# EAGLE board MegaMiniProto (EAGLE 6.3)
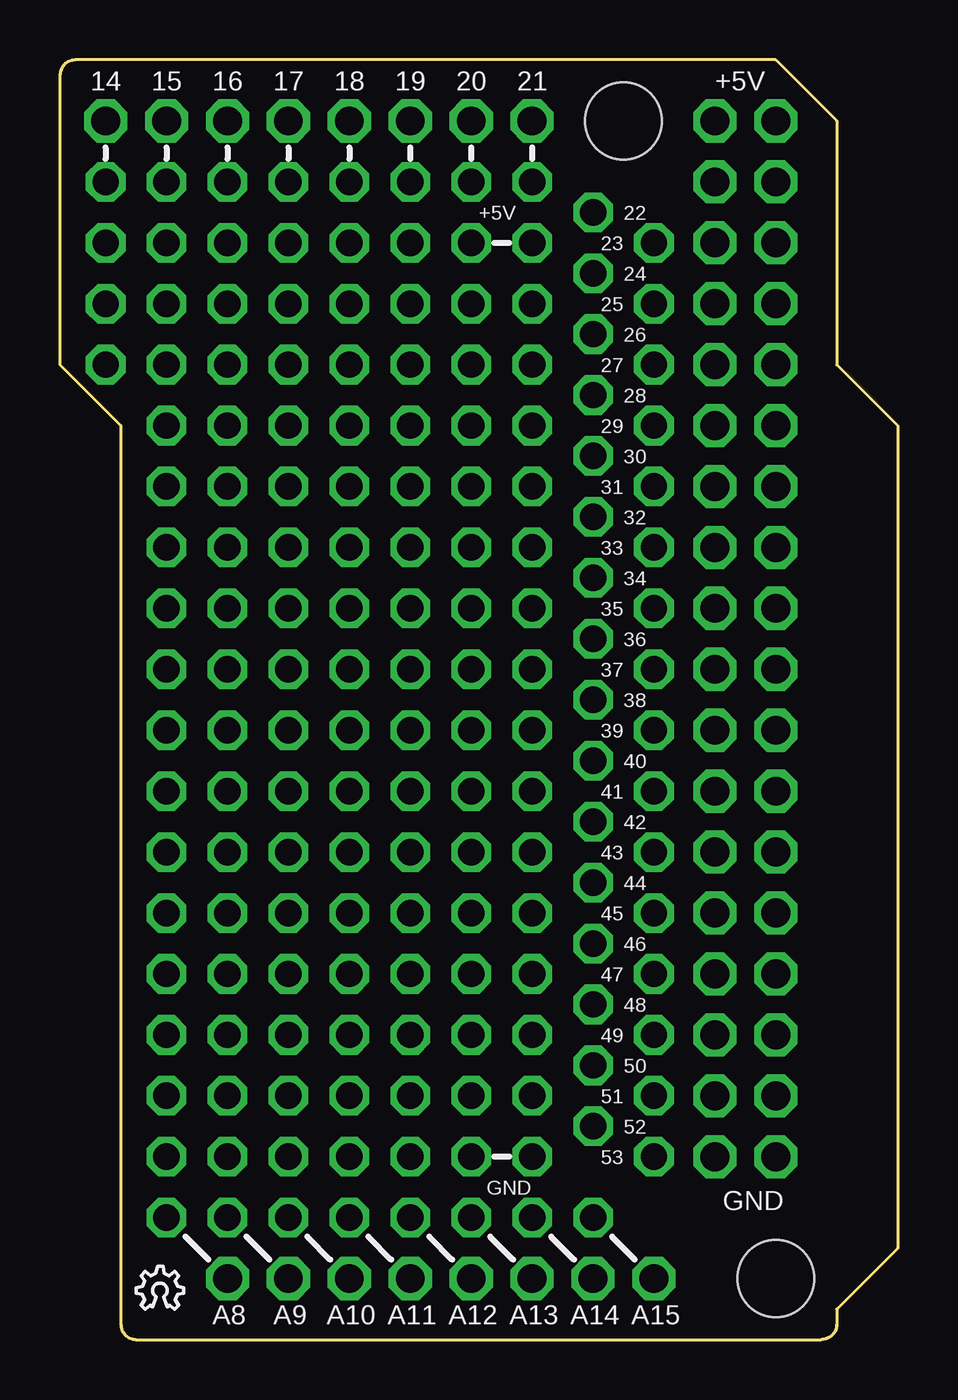
[diagram p0: board, top side]
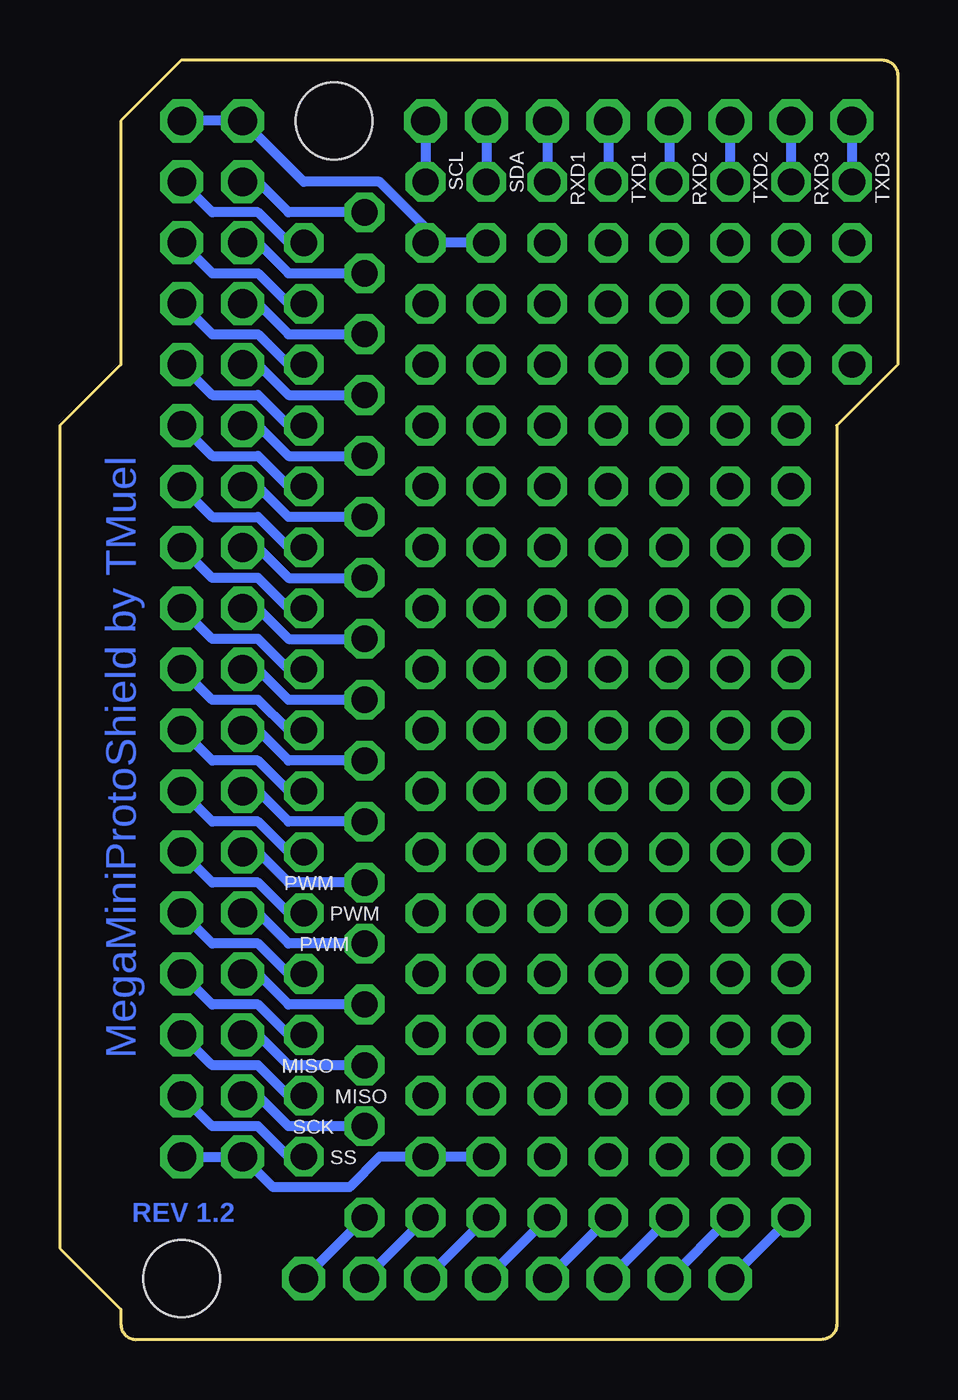
[diagram p1: board, bottom side, seen from below]

Size 34.93 x 53.34 mm. Coordinates in mm from the lower left corner, seen from the top.
Copper layers (1*16): Top 0.0356mm / dielectric 1.5011mm / Bottom 0.0356mm
Design rules "LaenPCBOrder": minimum track width 6mil, minimum drill 13mil, track to track 6mil, track to pad 6mil, pad to pad 6mil, via to via 6mil, smd to smd 6mil, copper to edge 15mil, drill to drill 6mil, minimum pad ring 7mil, minimum via ring 7mil, stop-mask expansion 3mil, vias tented up to drill 0mil, thermal gap 10mil

## Footprints (pad centres in the part's own frame; a part is rotated, then mirrored left to right if it is on the bottom)
MINI_MEGASHIELD_NO_LABEL = drill 1.2 octagon: 5V1 27.94,50.8; 5V2 30.48,50.8; 14 2.54,50.8; 15 5.08,50.8; 16 7.62,50.8; 17 10.16,50.8; 18 12.7,50.8; 19 15.24,50.8; 20 17.78,50.8; 21 20.32,50.8; 22 27.94,48.26; 23 30.48,48.26; 24 27.94,45.72; 25 30.48,45.72; 26 27.94,43.18; 27 30.48,43.18; 28 27.94,40.64; 29 30.48,40.64; 30 27.94,38.1; 31 30.48,38.1; 32 27.94,35.56; 33 30.48,35.56; 34 27.94,33.02; 35 30.48,33.02; 36 27.94,30.48; 37 30.48,30.48; 38 27.94,27.94; 39 30.48,27.94; 40 27.94,25.4; 41 30.48,25.4; 42 27.94,22.86; 43 30.48,22.86; 44 27.94,20.32; 45 30.48,20.32; 46 27.94,17.78; 47 30.48,17.78; 48 27.94,15.24; 49 30.48,15.24; 50 27.94,12.7; 51 30.48,12.7; 52 27.94,10.16; 53 30.48,10.16; A8 7.62,2.54; A9 10.16,2.54; A10 12.7,2.54; A11 15.24,2.54; A12 17.78,2.54; A13 20.32,2.54; A14 22.86,2.54; A15 25.4,2.54; GND1 27.94,7.62; GND2 30.48,7.62 | hole 3.2: 30.48,2.54; 24.13,50.8

## Placement (x,y rotation side)
E$1  [OSHW_6X70_NOTEXT]  3.17,1.27 0 top
E$2  [MINI_MEGASHIELD_NO_LABEL]  -0.64,0 0 top

## Library data of the parts
E$1 = ohw-logo
E$2 = arduino

## Nets
14: E$2.14
15: E$2.15
16: E$2.16
17: E$2.17
18: E$2.18
19: E$2.19
20: E$2.20
21: E$2.21
22: E$2.22
23: E$2.23
24: E$2.24
25: E$2.25
26: E$2.26
27: E$2.27
28: E$2.28
29: E$2.29
30: E$2.30
31: E$2.31
32: E$2.32
33: E$2.33
34: E$2.34
35: E$2.35
36: E$2.36
37: E$2.37
38: E$2.38
39: E$2.39
40: E$2.40
41: E$2.41
42: E$2.42
43: E$2.43
44: E$2.44
45: E$2.45
46: E$2.46
47: E$2.47
48: E$2.48
49: E$2.49
50: E$2.50
51: E$2.51
52: E$2.52
53: E$2.53
+5V: E$2.5V1 E$2.5V2
A8: E$2.A8
A9: E$2.A9
A10: E$2.A10
A11: E$2.A11
A12: E$2.A12
A13: E$2.A13
A14: E$2.A14 E$2.A15
GND: E$2.GND1 E$2.GND2

## Tracks (layer width: path | path; a pad name or v marks a point on that pad's centre or on a via)
14  (via drill 1.1 pad 1.27)
  Bottom 0.406: E$2.14 v1.91,48.26
15  (via drill 1.1 pad 1.27)
  Bottom 0.406: E$2.15 v4.45,48.26
16  (via drill 1.1 pad 1.27)
  Bottom 0.406: E$2.16 v6.99,48.26
17  (via drill 1.1 pad 1.27)
  Bottom 0.406: E$2.17 v9.53,48.26
18  (via drill 1.1 pad 1.27)
  Bottom 0.406: E$2.18 v12.06,48.26
19  (via drill 1.1 pad 1.27)
  Bottom 0.406: E$2.19 v14.61,48.26
20  (via drill 1.1 pad 1.27)
  Bottom 0.406: E$2.20 v17.14,48.26
21  (via drill 1.1 pad 1.27)
  Bottom 0.406: E$2.21 v19.68,48.26
22  (via drill 1.1 pad 1.27)
  Bottom 0.406: v22.22,46.99 25.4,46.99 26.67,48.26 E$2.22
23  (via drill 1.1 pad 1.27)
  Bottom 0.406: v24.76,45.72 25.4,45.72 26.67,46.99 28.57,46.99 E$2.23
24  (via drill 1.1 pad 1.27)
  Bottom 0.406: E$2.24 26.67,45.72 25.4,44.45 v22.22,44.45
25  (via drill 1.1 pad 1.27)
  Bottom 0.406: E$2.25 28.57,44.45 26.67,44.45 25.4,43.18 v24.76,43.18
26  (via drill 1.1 pad 1.27)
  Bottom 0.406: E$2.26 26.67,43.18 25.4,41.91 v22.22,41.91
27  (via drill 1.1 pad 1.27)
  Bottom 0.406: E$2.27 28.57,41.91 26.67,41.91 25.4,40.64 v24.76,40.64
28  (via drill 1.1 pad 1.27)
  Bottom 0.406: E$2.28 26.67,40.64 25.4,39.37 v22.22,39.37
29  (via drill 1.1 pad 1.27)
  Bottom 0.406: E$2.29 28.57,39.37 26.67,39.37 25.4,38.1 v24.76,38.1
30  (via drill 1.1 pad 1.27)
  Bottom 0.406: E$2.30 26.67,38.1 25.4,36.83 v22.22,36.83
31  (via drill 1.1 pad 1.27)
  Bottom 0.406: E$2.31 28.57,36.83 26.67,36.83 25.4,35.56 v24.76,35.56
32  (via drill 1.1 pad 1.27)
  Bottom 0.406: E$2.32 26.67,35.56 25.4,34.29 v22.22,34.29
33  (via drill 1.1 pad 1.27)
  Bottom 0.406: E$2.33 28.57,34.29 26.67,34.29 25.4,33.02 v24.76,33.02
34  (via drill 1.1 pad 1.27)
  Bottom 0.406: E$2.34 26.67,33.02 25.4,31.75 v22.22,31.75
35  (via drill 1.1 pad 1.27)
  Bottom 0.406: v24.76,30.48 25.4,30.48 26.67,31.75 28.57,31.75 E$2.35
36  (via drill 1.1 pad 1.27)
  Bottom 0.406: E$2.36 26.67,30.48 25.4,29.21 v22.22,29.21
37  (via drill 1.1 pad 1.27)
  Bottom 0.406: v24.76,27.94 25.4,27.94 26.67,29.21 28.57,29.21 E$2.37
38  (via drill 1.1 pad 1.27)
  Bottom 0.406: v22.22,26.67 25.4,26.67 26.67,27.94 E$2.38
39  (via drill 1.1 pad 1.27)
  Bottom 0.406: v24.76,25.4 25.4,25.4 26.67,26.67 28.57,26.67 E$2.39
40  (via drill 1.1 pad 1.27)
  Bottom 0.406: v22.22,24.13 25.4,24.13 26.67,25.4 E$2.40
41  (via drill 1.1 pad 1.27)
  Bottom 0.406: v24.76,22.86 25.4,22.86 26.67,24.13 28.57,24.13 E$2.41
42  (via drill 1.1 pad 1.27)
  Bottom 0.406: v22.22,21.59 25.4,21.59 26.67,22.86 E$2.42
43  (via drill 1.1 pad 1.27)
  Bottom 0.406: v24.76,20.32 25.4,20.32 26.67,21.59 28.57,21.59 E$2.43
44  (via drill 1.1 pad 1.27)
  Bottom 0.406: v22.22,19.05 25.4,19.05 26.67,20.32 E$2.44
45  (via drill 1.1 pad 1.27)
  Bottom 0.406: v24.76,17.78 25.4,17.78 26.67,19.05 28.57,19.05 E$2.45
46  (via drill 1.1 pad 1.27)
  Bottom 0.406: v22.22,16.51 25.4,16.51 26.67,17.78 E$2.46
47  (via drill 1.1 pad 1.27)
  Bottom 0.406: v24.76,15.24 25.4,15.24 26.67,16.51 28.57,16.51 E$2.47
48  (via drill 1.1 pad 1.27)
  Bottom 0.406: v22.22,13.97 25.4,13.97 26.67,15.24 E$2.48
49  (via drill 1.1 pad 1.27)
  Bottom 0.406: v24.76,12.7 25.4,12.7 26.67,13.97 28.57,13.97 E$2.49
50  (via drill 1.1 pad 1.27)
  Bottom 0.406: v22.22,11.43 25.4,11.43 26.67,12.7 E$2.50
51  (via drill 1.1 pad 1.27)
  Bottom 0.406: v24.76,10.16 25.4,10.16 26.67,11.43 28.57,11.43 E$2.51
52  (via drill 1.1 pad 1.27)
  Bottom 0.406: v22.22,8.89 25.4,8.89 26.67,10.16 E$2.52
53  (via drill 1.1 pad 1.27)
  Bottom 0.406: v24.76,7.62 25.4,7.62 26.67,8.89 28.57,8.89 E$2.53
+5V  (via drill 1.1 pad 1.27)
  Bottom 0.406: v17.14,45.72 v19.68,45.72 19.68,46.35 21.59,48.26 24.76,48.26 E$2.5V1 E$2.5V2
A8  (via drill 1.1 pad 1.27)
  Bottom 0.406: E$2.A8 v4.45,5.08
A9  (via drill 1.1 pad 1.27)
  Bottom 0.406: E$2.A9 v6.99,5.08
A10  (via drill 1.1 pad 1.27)
  Bottom 0.406: E$2.A10 v9.53,5.08
A11  (via drill 1.1 pad 1.27)
  Bottom 0.406: E$2.A11 v12.06,5.08
A12  (via drill 1.1 pad 1.27)
  Bottom 0.406: E$2.A12 v14.61,5.08
A13  (via drill 1.1 pad 1.27)
  Bottom 0.406: E$2.A13 v17.14,5.08
A14  (via drill 1.1 pad 1.27)
  Bottom 0.406: E$2.A15 v22.22,5.08 | E$2.A14 v19.68,5.08
GND  (via drill 1.1 pad 1.27)
  Bottom 0.406: v17.14,7.62 v19.68,7.62 21.59,7.62 22.86,6.35 26.04,6.35 E$2.GND1 E$2.GND2
S$1  (via drill 1.1 pad 1.27)
  other vias: 1.91,45.72
S$2  (via drill 1.1 pad 1.27)
  other vias: 4.45,45.72
S$3  (via drill 1.1 pad 1.27)
  other vias: 6.99,45.72
S$4  (via drill 1.1 pad 1.27)
  other vias: 9.53,45.72
S$5  (via drill 1.1 pad 1.27)
  other vias: 12.06,45.72
S$6  (via drill 1.1 pad 1.27)
  other vias: 14.61,45.72
S$10  (via drill 1.1 pad 1.27)
  other vias: 1.91,43.18
S$11  (via drill 1.1 pad 1.27)
  other vias: 4.45,43.18
S$12  (via drill 1.1 pad 1.27)
  other vias: 1.91,40.64
S$13  (via drill 1.1 pad 1.27)
  other vias: 4.45,40.64
S$14  (via drill 1.1 pad 1.27)
  other vias: 6.99,40.64
S$15  (via drill 1.1 pad 1.27)
  other vias: 6.99,43.18
S$16  (via drill 1.1 pad 1.27)
  other vias: 9.53,43.18
S$17  (via drill 1.1 pad 1.27)
  other vias: 9.53,40.64
S$18  (via drill 1.1 pad 1.27)
  other vias: 12.06,40.64
S$19  (via drill 1.1 pad 1.27)
  other vias: 12.06,43.18
S$20  (via drill 1.1 pad 1.27)
  other vias: 14.61,43.18
S$21  (via drill 1.1 pad 1.27)
  other vias: 14.61,40.64
S$22  (via drill 1.1 pad 1.27)
  other vias: 17.14,40.64
S$23  (via drill 1.1 pad 1.27)
  other vias: 17.14,43.18
S$24  (via drill 1.1 pad 1.27)
  other vias: 19.68,43.18
S$25  (via drill 1.1 pad 1.27)
  other vias: 19.68,40.64
S$28  (via drill 1.1 pad 1.27)
  other vias: 4.45,38.1
S$29  (via drill 1.1 pad 1.27)
  other vias: 6.99,38.1
S$30  (via drill 1.1 pad 1.27)
  other vias: 9.53,38.1
S$31  (via drill 1.1 pad 1.27)
  other vias: 12.06,38.1
S$32  (via drill 1.1 pad 1.27)
  other vias: 14.61,38.1
S$33  (via drill 1.1 pad 1.27)
  other vias: 17.14,38.1
S$34  (via drill 1.1 pad 1.27)
  other vias: 19.68,38.1
S$36  (via drill 1.1 pad 1.27)
  other vias: 4.45,35.56
S$37  (via drill 1.1 pad 1.27)
  other vias: 4.45,33.02
S$38  (via drill 1.1 pad 1.27)
  other vias: 6.99,33.02
S$39  (via drill 1.1 pad 1.27)
  other vias: 6.99,35.56
S$40  (via drill 1.1 pad 1.27)
  other vias: 9.53,35.56
S$41  (via drill 1.1 pad 1.27)
  other vias: 9.53,33.02
S$42  (via drill 1.1 pad 1.27)
  other vias: 12.06,33.02
S$43  (via drill 1.1 pad 1.27)
  other vias: 12.06,35.56
S$44  (via drill 1.1 pad 1.27)
  other vias: 14.61,35.56
S$45  (via drill 1.1 pad 1.27)
  other vias: 14.61,33.02
S$46  (via drill 1.1 pad 1.27)
  other vias: 17.14,33.02
S$47  (via drill 1.1 pad 1.27)
  other vias: 17.14,35.56
S$48  (via drill 1.1 pad 1.27)
  other vias: 19.68,35.56
S$49  (via drill 1.1 pad 1.27)
  other vias: 19.68,33.02
S$52  (via drill 1.1 pad 1.27)
  other vias: 4.45,30.48
S$53  (via drill 1.1 pad 1.27)
  other vias: 6.99,30.48
S$54  (via drill 1.1 pad 1.27)
  other vias: 9.53,30.48
S$55  (via drill 1.1 pad 1.27)
  other vias: 12.06,30.48
S$56  (via drill 1.1 pad 1.27)
  other vias: 14.61,30.48
S$57  (via drill 1.1 pad 1.27)
  other vias: 17.14,30.48
S$58  (via drill 1.1 pad 1.27)
  other vias: 19.68,30.48
S$60  (via drill 1.1 pad 1.27)
  other vias: 4.45,27.94
S$61  (via drill 1.1 pad 1.27)
  other vias: 4.45,25.4
S$62  (via drill 1.1 pad 1.27)
  other vias: 6.99,25.4
S$63  (via drill 1.1 pad 1.27)
  other vias: 6.99,27.94
S$64  (via drill 1.1 pad 1.27)
  other vias: 9.53,27.94
S$65  (via drill 1.1 pad 1.27)
  other vias: 9.53,25.4
S$66  (via drill 1.1 pad 1.27)
  other vias: 12.06,25.4
S$67  (via drill 1.1 pad 1.27)
  other vias: 12.06,27.94
S$68  (via drill 1.1 pad 1.27)
  other vias: 14.61,27.94
S$69  (via drill 1.1 pad 1.27)
  other vias: 14.61,25.4
S$70  (via drill 1.1 pad 1.27)
  other vias: 17.14,25.4
S$71  (via drill 1.1 pad 1.27)
  other vias: 17.14,27.94
S$72  (via drill 1.1 pad 1.27)
  other vias: 19.68,27.94
S$73  (via drill 1.1 pad 1.27)
  other vias: 19.68,25.4
S$76  (via drill 1.1 pad 1.27)
  other vias: 4.45,22.86
S$77  (via drill 1.1 pad 1.27)
  other vias: 6.99,22.86
S$78  (via drill 1.1 pad 1.27)
  other vias: 9.53,22.86
S$79  (via drill 1.1 pad 1.27)
  other vias: 12.06,22.86
S$80  (via drill 1.1 pad 1.27)
  other vias: 14.61,22.86
S$81  (via drill 1.1 pad 1.27)
  other vias: 17.14,22.86
S$82  (via drill 1.1 pad 1.27)
  other vias: 19.68,22.86
S$84  (via drill 1.1 pad 1.27)
  other vias: 4.45,20.32
S$85  (via drill 1.1 pad 1.27)
  other vias: 4.45,17.78
S$86  (via drill 1.1 pad 1.27)
  other vias: 6.99,17.78
S$87  (via drill 1.1 pad 1.27)
  other vias: 6.99,20.32
S$88  (via drill 1.1 pad 1.27)
  other vias: 9.53,20.32
S$89  (via drill 1.1 pad 1.27)
  other vias: 9.53,17.78
S$90  (via drill 1.1 pad 1.27)
  other vias: 12.06,17.78
S$91  (via drill 1.1 pad 1.27)
  other vias: 12.06,20.32
S$92  (via drill 1.1 pad 1.27)
  other vias: 14.61,20.32
S$93  (via drill 1.1 pad 1.27)
  other vias: 14.61,17.78
S$94  (via drill 1.1 pad 1.27)
  other vias: 17.14,17.78
S$95  (via drill 1.1 pad 1.27)
  other vias: 17.14,20.32
S$96  (via drill 1.1 pad 1.27)
  other vias: 19.68,20.32
S$97  (via drill 1.1 pad 1.27)
  other vias: 19.68,17.78
S$100  (via drill 1.1 pad 1.27)
  other vias: 4.45,15.24
S$101  (via drill 1.1 pad 1.27)
  other vias: 6.99,15.24
S$102  (via drill 1.1 pad 1.27)
  other vias: 9.53,15.24
S$103  (via drill 1.1 pad 1.27)
  other vias: 12.06,15.24
S$104  (via drill 1.1 pad 1.27)
  other vias: 14.61,15.24
S$105  (via drill 1.1 pad 1.27)
  other vias: 17.14,15.24
S$106  (via drill 1.1 pad 1.27)
  other vias: 19.68,15.24
S$108  (via drill 1.1 pad 1.27)
  other vias: 4.45,12.7
S$109  (via drill 1.1 pad 1.27)
  other vias: 4.45,10.16
S$110  (via drill 1.1 pad 1.27)
  other vias: 6.99,10.16
S$111  (via drill 1.1 pad 1.27)
  other vias: 6.99,12.7
S$112  (via drill 1.1 pad 1.27)
  other vias: 9.53,12.7
S$113  (via drill 1.1 pad 1.27)
  other vias: 9.53,10.16
S$114  (via drill 1.1 pad 1.27)
  other vias: 12.06,10.16
S$115  (via drill 1.1 pad 1.27)
  other vias: 12.06,12.7
S$116  (via drill 1.1 pad 1.27)
  other vias: 14.61,12.7
S$117  (via drill 1.1 pad 1.27)
  other vias: 14.61,10.16
S$118  (via drill 1.1 pad 1.27)
  other vias: 17.14,10.16
S$119  (via drill 1.1 pad 1.27)
  other vias: 17.14,12.7
S$120  (via drill 1.1 pad 1.27)
  other vias: 19.68,12.7
S$121  (via drill 1.1 pad 1.27)
  other vias: 19.68,10.16
S$124  (via drill 1.1 pad 1.27)
  other vias: 4.45,7.62
S$125  (via drill 1.1 pad 1.27)
  other vias: 6.99,7.62
S$126  (via drill 1.1 pad 1.27)
  other vias: 9.53,7.62
S$127  (via drill 1.1 pad 1.27)
  other vias: 12.06,7.62
S$128  (via drill 1.1 pad 1.27)
  other vias: 14.61,7.62

## Text on the board
Bottom: MegaMiniProtoShield by TMuel | REV 1.2
tPlace: 14 | 15 | 16 | 17 | 18 | 19 | 20 | 21 | +5V | +5V | 22 | 23 | 24 | 25 | 26 | 27 | 28 | 29 | 30 | 31 | 32 | 33 | 34 | 35 | 36 | 37 | 38 | 39 | 40 | 41 | 42 | 43 | 44 | 45 | 46 | 47 | 48 | 49 | 50 | 51 | 52 | 53 | GND | GND | A8 | A9 | A10 | A11 | A12 | A13 | A14 | A15
bPlace: TXD3 | RXD3 | TXD2 | RXD2 | TXD1 | RXD1 | SDA | SCL | PWM | PWM | PWM | MISO | MISO | SCK | SS